# EAGLE board CRSpill (EAGLE 9.6.2)
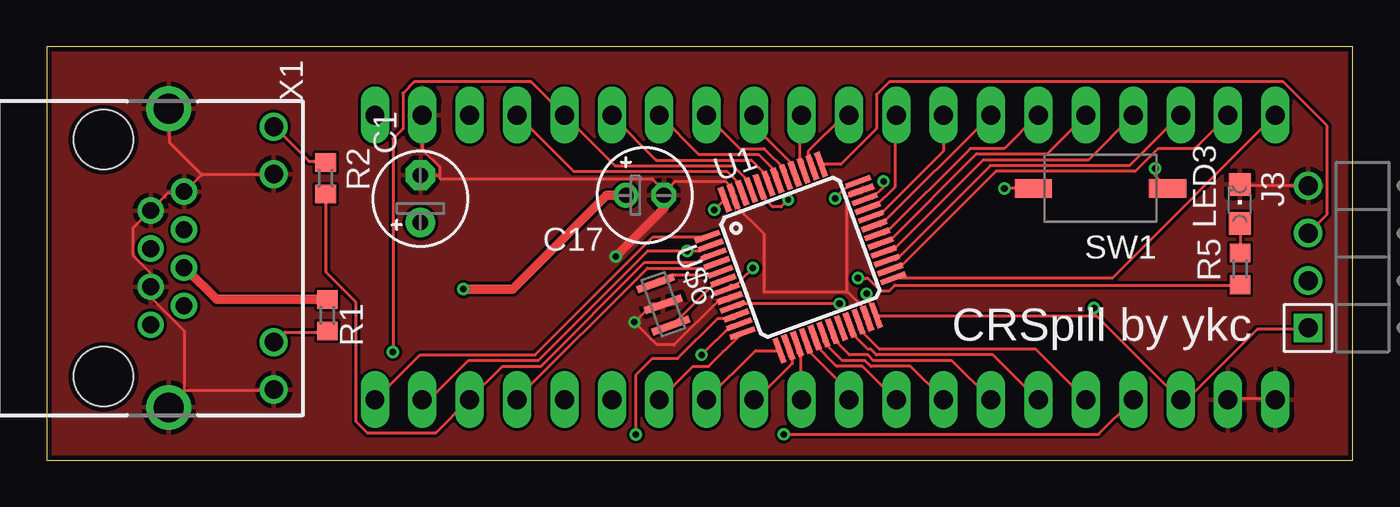
[diagram p0: board, top side]
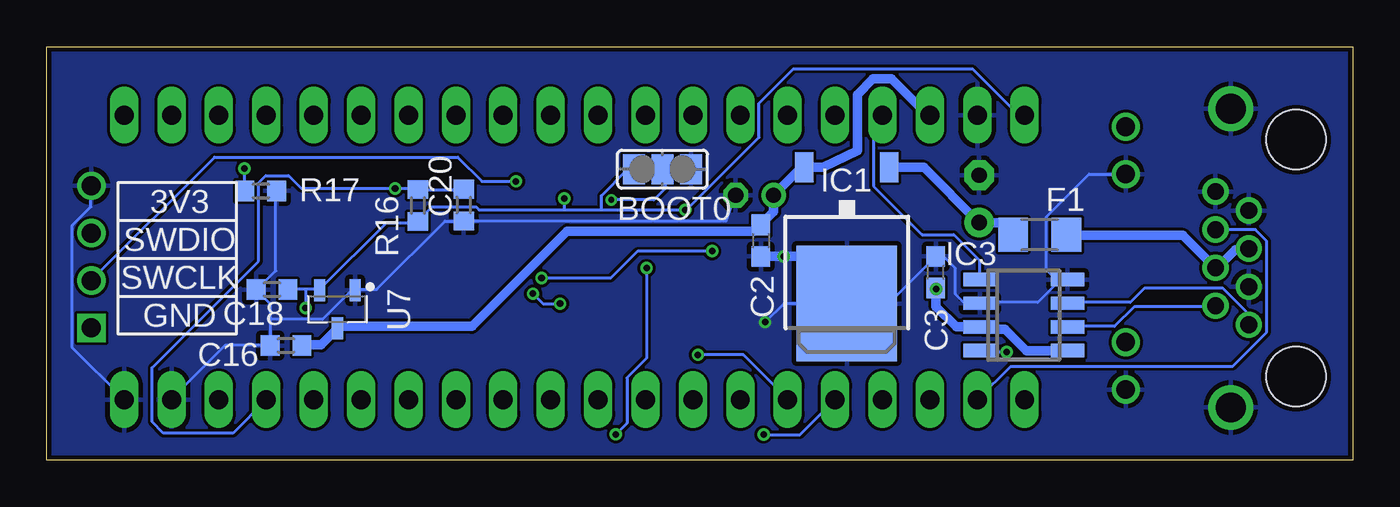
[diagram p1: board, bottom side, seen from below]

Size 70 x 22.16 mm. Coordinates in mm from the lower left corner, seen from the top.
Outline: 0,0 70,0 70,22.16 0,22.16 0,0
Copper layers (1*16): Top 0.035mm / dielectric 1.5mm / Bottom 0.035mm
Design rules "SeeedStudio_2layer_DRU_no_angle_20140221": minimum track width 6mil, minimum drill 12mil, track to track 6mil, track to pad 6mil, pad to pad 6mil, via to via 6mil, smd to smd 0mil, copper to edge 10mil, drill to drill 10mil, minimum pad ring 10mil, minimum via ring 6mil, stop-mask expansion 2mil, vias tented up to drill 100mil, thermal gap 10mil
Net classes: 1 12v: width 0.5 mm

## Footprints (pad centres in the part's own frame; a part is rotated, then mirrored left to right if it is on the bottom)
SJ_2 = smd 1.168 x 1.6: 1 -1.524,0; 2 0,0; 3 1.524,0
E2,5-5 = drill 0.813 pad 1.6: + -1.27,0 | drill 0.813 pad 1.6 octagon: - 1.27,0
C0603 = smd 1.1 x 1: 1 -0.85,0; 2 0.85,0
C0603' = smd 1 x 1.1: 1 -0.85,0; 2 0.85,0
E2-5 = drill 0.813 pad 1.27: + -1.016,0 | drill 0.813 pad 1.27 octagon: - 1.016,0
R1206 = smd 1.6 x 1.803: 1 -1.422,0; 2 1.422,0
TO252 = smd 1 x 1.6: 1 -2.28,-4.8; 2 2.28,-4.8 | smd 5.4 x 6.2: 3 0,2.5
BLUE_PILL = drill 1.016 long: P$1 -7.62,10.16; P$2 -7.62,7.62; P$3 -7.62,5.08; P$4 -7.62,2.54; P$5 -7.62,0; P$6 -7.62,-2.54; P$7 -7.62,-5.08; P$8 -7.62,-7.62; P$9 -7.62,-10.16; P$10 -7.62,-12.7; P$11 -7.62,-15.24; P$12 -7.62,-17.78; P$13 -7.62,-20.32; P$14 -7.62,-22.86; P$15 -7.62,-25.4; P$16 -7.62,-27.94; P$17 -7.62,-30.48; P$18 -7.62,-33.02; P$19 -7.62,-35.56; P$20 -7.62,-38.1; P$21 7.62,-38.1; P$22 7.62,-35.56; P$23 7.62,-33.02; P$24 7.62,-30.48; P$25 7.62,-27.94; P$26 7.62,-25.4; P$27 7.62,-22.86; P$28 7.62,-20.32; P$29 7.62,-17.78; P$30 7.62,-15.24; P$31 7.62,-12.7; P$32 7.62,-10.16; P$33 7.62,-7.62; P$34 7.62,-5.08; P$35 7.62,-2.54; P$36 7.62,0; P$37 7.62,2.54; P$38 7.62,5.08; P$39 7.62,7.62; P$40 7.62,10.16
SO08 = smd 0.72 x 1.78: 1 -1.905,-2.35; 2 -0.635,-2.35; 3 0.635,-2.35; 4 1.905,-2.35; 5 1.905,2.35; 6 0.635,2.35; 7 -0.635,2.35; 8 -1.905,2.35
MA04-1 = drill 1.016 square: 1 3.81,0 | drill 1.016: 2 1.27,0; 3 -1.27,0; 4 -3.81,0
CHIPLED_0805 = smd 1.2 x 1.2: A 0,-1.05; C 0,1.05
R0603 = smd 1 x 1.1: 1 -0.85,0; 2 0.85,0
SWITCH_TACTILE_3X6 = smd 2 x 1: P$1 -3.6,0; P$2 3.6,0
LQFP48 = smd 1.4 x 0.3: 1 -4.3,2.75; 2 -4.3,2.25; 3 -4.3,1.75; 4 -4.3,1.25; 5 -4.3,0.75; 6 -4.3,0.25; 7 -4.3,-0.25; 8 -4.3,-0.75; 9 -4.3,-1.25; 10 -4.3,-1.75; 11 -4.3,-2.25; 12 -4.3,-2.75; 25 4.3,-2.75; 26 4.3,-2.25; 27 4.3,-1.75; 28 4.3,-1.25; 29 4.3,-0.75; 30 4.3,-0.25; 31 4.3,0.25; 32 4.3,0.75; 33 4.3,1.25; 34 4.3,1.75; 35 4.3,2.25; 36 4.3,2.75 | smd 0.3 x 1.4: 13 -2.75,-4.3; 14 -2.25,-4.3; 15 -1.75,-4.3; 16 -1.25,-4.3; 17 -0.75,-4.3; 18 -0.25,-4.3; 19 0.25,-4.3; 20 0.75,-4.3; 21 1.25,-4.3; 22 1.75,-4.3; 23 2.25,-4.3; 24 2.75,-4.3; 37 2.75,4.3; 38 2.25,4.3; 39 1.75,4.3; 40 1.25,4.3; 41 0.75,4.3; 42 0.25,4.3; 43 -0.25,4.3; 44 -0.75,4.3; 45 -1.25,4.3; 46 -1.75,4.3; 47 -2.25,4.3; 48 -2.75,4.3
SOT95P240X110-3 = smd 1.18 x 0.609: 1 -1.024,0.95; 2 -1.024,-0.95; 3 1.024,0
CSTCE8M00G55 = smd 0.4 x 2.1: 1 -1.2,0; 2 0,0; 3 1.2,0
8P8C-LED = drill 0.9 pad 1.3: 1 3.57,-3.81; 2 2.55,-2.03; 3 1.53,-3.81; 4 0.51,-2.03; 5 -0.51,-3.81; 6 -1.53,-2.03; 7 -2.55,-3.81; 8 -3.57,-2.03 | drill 1 pad 1.422: GA 4.5,2.78; GC 7.04,2.78; YA -7.04,2.78; YC -4.5,2.78 | drill 1.6 pad 2.184: M1 -8,-2.85; M2 8,-2.85 | hole 3.2: 6.35,-6.35; -6.35,-6.35

## Placement (x,y rotation side)
BOOT0  [SJ_2]  37,15.6 0 bottom
C1  22u  [E2,5-5]  20.03,14.01 90 top
C2  100n  [C0603]  31.73,11.77 270 bottom
C3  100n  [C0603]  22.35,10.08 90 bottom
C16  100n  [C0603']  57.17,6.15 180 bottom
C17  22u  [E2-5]  32.06,14.2 0 top
C18  100n  [C0603']  57.92,9.15 180 bottom
C20  100n  [C0603']  47.65,13.67 90 bottom
F1  [R1206]  16.78,12.08 0 bottom
IC1  7805DT  [TO252]  27.12,10.9 180 bottom
IC2  BLUE_PILL  [BLUE_PILL]  27.75,10.87 90 top
IC3  NCV7351D1E  [SO08]  17.64,7.78 270 bottom
J3  MA04-1  [MA04-1]  67.6,10.9 270 top
LED3  red  [CHIPLED_0805]  63.94,13.73 0 top
R1  4k7  [R0603]  15.05,7.77 270 top
R2  470  [R0603]  14.95,15.11 90 top
R5  1k  [R0603]  63.95,10.26 90 top
R16  10k  [R0603]  50.11,13.65 90 bottom
R17  100R  [R0603]  58.52,14.43 0 bottom
SW1  SWITCH_TACTILETOP  [SWITCH_TACTILE_3X6]  56.48,14.57 180 top
U1  STM32F103C8  [LQFP48]  40.39,10.87 20 top
U7  XC6206  [SOT95P240X110-3]  54.42,8.09 270 bottom
U$6  CSTCE8M00G55  [CSTCE8M00G55]  33.04,8.36 290 top
X1  8P8C-LED  [8P8C-LED]  9.39,10.83 270 top

## Library data of the parts
BOOT0 = jumper
C1-C3 = rcl; SPICEPREFIX: C
C16-C18 C20 R16 R17 = rcl
F1 R1 R2 R5 = rcl; SPICEPREFIX: R
IC1 = linear
IC2 U1 = stm32_mcu
IC3 = on-semi
J3 = con-headers
LED3 = led
SW1 = switch-tactile
U7 = torex
U$6 = resonator
X1 = con-rj45; OC_FARNELL: unknown; OC_NEWARK: unknown

## Nets
!EMS: IC2.P$2 R5.1 U1.2 X1.6
!RESET: C20.2 IC2.P$17 R16.2 SW1.P$2 U1.7
+3V3: BOOT0.1 C18.1 IC2.P$18 IC2.P$40 J3.1 R16.1 U1.9 U1.24 U1.36 U1.48 U7.2
+5V [12v]: C2.1 C3.1 C16.1 C17.+ IC1.2 IC2.P$38 IC3.3 IC3.5 U7.3
BOOT0: BOOT0.2 U1.44
CANRX: IC2.P$36 IC3.4 U1.45
CANTX: IC2.P$37 IC3.1 U1.46
GND: BOOT0.3 C1.- C2.2 C3.2 C16.2 C17.- C18.2 C20.1 IC1.3 IC2.P$19 IC2.P$20 IC2.P$39 IC3.2 IC3.8 J3.4 LED3.C R17.2 U1.8 U1.23 U1.35 U1.47 U7.1 U$6.2 X1.3 X1.7 X1.8 X1.GC X1.M1 X1.M2 X1.YC
LED_CAN: IC2.P$3 R2.1 U1.3
N$1: R1.2 X1.GA
N$2 [12v]: F1.2 R1.1 X1.4 X1.5
N$3 [12v]: C1.+ F1.1 IC1.1
N$4: IC3.7 X1.1
N$5: IC3.6 X1.2
N$9: R2.2 X1.YA
N$11: U1.6 U$6.3
N$15: LED3.A R5.2
N$16: R17.1 SW1.P$1
N$19: U1.5 U$6.1
PA0: IC2.P$5 U1.10
PA1: IC2.P$6 U1.11
PA2: IC2.P$7 U1.12
PA3: IC2.P$8 U1.13
PA4: IC2.P$9 U1.14
PA5: IC2.P$10 U1.15
PA6: IC2.P$11 U1.16
PA7: IC2.P$12 U1.17
PA8: IC2.P$25 U1.29
PA9: IC2.P$26 U1.30
PA10: IC2.P$27 U1.31
PA11: IC2.P$28 U1.32
PA12: IC2.P$29 U1.33
PA15: IC2.P$30 U1.38
PB0: IC2.P$13 U1.18
PB1: IC2.P$14 U1.19
PB2: U1.20
PB3: IC2.P$31 U1.39
PB4: IC2.P$32 U1.40
PB5: IC2.P$33 U1.41
PB6: IC2.P$34 U1.42
PB7: IC2.P$35 U1.43
PB10: IC2.P$15 U1.21
PB11: IC2.P$16 U1.22
PB12: IC2.P$21 U1.25
PB13: IC2.P$22 U1.26
PB14: IC2.P$23 U1.27
PB15: IC2.P$24 U1.28
PC15: IC2.P$4 U1.4
SWCLK: J3.3 U1.37
SWDIO: J3.2 U1.34
VBAT: IC2.P$1 U1.1

## Tracks (layer width: path | path; a pad name or v marks a point on that pad's centre or on a via)
!EMS  (via drill 0.35)
  Top 0.152: v43.48,9.76 44.01,9.76 44.7,9.08 45.15,9.08 45.46,9.38 63.9,9.38 R5.1 | U1.2 35.55,11.44 35.25,11.44 35.02,11.21 v34.33,11.21 32.2,11.21 26.33,5.34 22.6,5.34 20.54,3.29 20.16,3.29 IC2.P$2
  Bottom 0.152: X1.6 5.22,12.35 4.62,11.74 4.62,6.87 6.44,5.04 18.33,5.04 20.08,3.29 IC2.P$2 | v43.48,9.76 39.78,9.76 38.33,11.21 v34.33,11.21
!RESET  (via drill 0.35)
  Top 0.152: v51.33,14.56 52.85,14.56 SW1.P$2 | U1.7 36.64,9.37 36.68,9.38 36.97,9.38 37.22,9.63 37.22,9.67 v37.85,10.3 | v39.5,1.39 56.37,1.39 IC2.P$17
  Bottom 0.152: C20.2 47.67,14.49 50.11,14.49 R16.2 50.18,14.56 v51.33,14.56 56.35,14.56 57.04,15.25 58.26,15.25 58.64,14.87 58.64,10.68 64.36,4.96 64.36,2.07 63.75,1.46 60.01,1.46 58.26,3.21 IC2.P$17 | v37.85,10.3 37.85,5.47 38.9,4.42 38.9,1.99 v39.5,1.39
+3V3  (via drill 0.35)
  Top 0.152: v42.49,8.39 37.3,8.39 37.15,8.24 36.85,8.24 U1.9 | v43.93,8.93 43.93,8.62 44.39,8.16 44.39,7.78 U1.24 44.47,7.71 56.13,7.71 | J3.1 67.56,7.02 64.89,7.02 61.16,3.29 60.77,3.29 IC2.P$18 60.7,3.29 56.28,7.71 56.13,7.71 | v35.78,13.42 36.31,13.95 U1.48 | v42.26,14.03 43.1,14.87 43.48,14.87 U1.36 | v56.13,8.16 56.13,7.71
  Bottom 0.152: v42.49,8.39 43.4,8.39 v43.93,8.93 | 56.13,9.15 55.44,9.15 U7.2 55.36,9.15 51.78,12.74 50.18,12.74 R16.1 49.34,13.57 46.98,13.57 46.83,13.42 42.26,13.42 | 56.13,9.15 57.04,9.15 C18.1 | 42.26,13.42 40.28,13.42 | 40.28,13.42 v35.78,13.42 35.7,13.42 31.82,17.31 31.82,19.14 29.99,20.96 20.39,20.96 17.95,18.53 17.64,18.53 IC2.P$40 | 42.26,13.42 v42.26,14.03 | 56.13,9.15 v56.13,8.16 | 40.28,13.42 40.28,14.18 38.91,15.55 38.53,15.55 BOOT0.1
+5V  (via drill 0.35)
  Top 0.5: v22.34,9.17 24.98,9.17 30.01,14.2 C17.+
  Bottom 0.5: IC3.5 15.36,5.88 17.49,5.88 18.64,7.02 19.78,7.02 IC3.3 21.25,7.15 22.34,8.24 v22.34,9.17 22.34,9.23 C3.1 | C16.1 56.28,6.18 55.29,6.18 54.45,7.02 U7.3 54.22,7.17 47.21,7.17 42.1,12.28 32.07,12.28 C2.1 31.04,13.31 C17.+ 29.54,15.7 IC1.2 28.4,15.7 26.56,16.58 26.56,19.59 25.72,20.43 24.73,20.43 22.83,18.53 22.67,18.53 IC2.P$38
BOOT0  (via drill 0.3)
  Top 0.152: v39.74,13.95 39.36,13.57 38.91,13.57 38.45,14.03 38.45,14.11 38.22,14.34 U1.44
  Bottom 0.152: v39.74,13.95 37.46,13.95 36.8,14.61 BOOT0.2
CANRX  (via drill 0.35)
  Top 0.152: U1.45 37.69,14.49 37.69,14.87 36.77,15.78 30.45,15.78 27.78,18.45 IC2.P$36 27.7,18.53 25.95,20.28 19.7,20.28 19.09,19.67 19.09,17.76 18.56,17.23 v18.56,5.8
  Bottom 0.152: v18.56,5.8 19.93,5.8 IC3.4
CANTX
  Top 0.152: U1.46 37.23,14.34 37.23,14.72 36.47,15.48 28.24,15.48 25.27,18.45 IC2.P$37
  Bottom 0.152: IC3.1 19.99,10.69 21.39,12.09 23.08,12.09 25.69,14.69 25.69,18.01 IC2.P$37
GND  (via drill 0.35)
  Top 0.152: LED3.C 63.98,14.72 67.56,14.72 J3.4 | IC2.P$19 63.37,3.29 65.8,3.29 IC2.P$20 | 7.4,3.7 6.6,2.9 X1.M2 | 7.4,3.7 7.43,3.74 12.16,3.74 X1.GC | 8.31,15.29 7.43,14.41 X1.8 7.36,14.34 6.52,14.34 5.61,13.42 X1.7 5.53,13.35 4.62,12.43 4.62,10.98 5.53,10.07 5.53,9.31 X1.3 5.61,9.23 5.61,8.7 7.36,6.94 7.36,3.74 7.4,3.7 | 8.31,15.29 8.35,15.33 X1.YC | 8.31,15.29 6.6,17 6.6,18.75 X1.M1 | 42.91,9.04 42.87,9.08 42.87,14.03 43.25,14.41 43.63,14.41 U1.35 | 42.91,9.04 43.93,8.01 43.93,7.63 U1.23 | 42.91,9.04 42.87,9 38.46,9 38.46,12.12 36.85,13.73 36.85,14.11 U1.47 36.77,14.18 36.77,14.56 36.39,14.95 33.67,14.95 C17.- 33.08,14.47 32.45,15.1 21.07,15.1 21.07,15.3 | 21.07,15.3 21.07,15.71 20.16,16.62 20.16,18.45 IC2.P$39 | U$6.2 32.46,8.36 v31.5,7.4 32.33,6.57 32.35,6.52 32.41,6.49 32.72,6.18 33.63,6.18 36.09,8.63 36.25,8.7 U1.8 | C1.- 21.05,15.28 21.07,15.3
  Top 0.5: v30.5,10.92 33.08,13.5 C17.-
  Bottom 0.152: 58.03,7.55 58.03,8.39 58.72,9.08 C18.2 58.72,9.15 57.73,10.14 57.73,14.41 R17.2 | 58.03,7.55 58.03,6.18 C16.2 58.11,6.18 60.39,6.18 63.29,3.29 IC2.P$19 | 58.03,7.55 55.21,7.55 53.69,9.08 53.53,9.08 U7.1 53.46,9.15 52.32,9.15 48.66,12.81 47.67,12.81 C20.1 47.59,12.81 33.58,12.81 C17.- | J3.4 67.63,14.64 67.63,13.57 68.62,12.58 68.62,6.03 65.88,3.29 IC2.P$20 | X1.YC 12.23,15.33 14.14,15.33 16.43,13.04 16.43,10.22 15.82,9.61 IC3.8 15.36,9.61 15.74,9.61 16.88,8.47 19.93,8.47 IC3.2 20.82,8.42 21.3,8.9 21.3,10.3 21.93,10.93 C3.2 24.81,8.47 27.05,8.47 IC1.3 30.5,8.4 v31.5,7.4
  Bottom 0.5: C2.2 v30.5,10.92 29.5,10.92 29.5,10.78 IC1.3
  pour Top: 0.1,22.1 0.1,0.1 69.9,0.1 69.9,22 0.2,22
  pour Bottom: 0.1,22.1 0.1,0.1 69.9,0.1 69.9,22.1
LED_CAN
  Top 0.152: R2.1 14.98,14.26 14.98,10.07 16.58,8.47 16.58,2.07 17.19,1.46 20.84,1.46 22.6,3.21 IC2.P$3 22.67,3.29 24.43,5.04 26.48,5.04 32.05,10.6 34.87,10.6 35.25,10.98 35.7,10.98 U1.3
N$1
  Top 0.152: R1.2 14.98,6.87 12.77,6.87 12.23,6.33 X1.GA
N$2
  Top 0.5: R1.1 14.98,8.62 9.11,8.62 7.43,10.3 X1.4
  Bottom 0.5: F1.2 15.28,12.05 9.11,12.05 7.43,10.37 X1.4 7.13,10.45 6.29,11.29 5.61,11.29 X1.5
N$3
  Bottom 0.5: F1.1 18.86,12.74 C1.+ 22.99,15.7 IC1.1
N$4
  Bottom 0.152: IC3.7 15.28,8.47 11.93,8.47 11.17,9.23 6.98,9.23 5.61,7.86 5.61,7.33 X1.1
N$5
  Bottom 0.152: IC3.6 15.28,7.17 12.77,7.17 11.7,8.24 7.43,8.24 X1.2
N$9
  Top 0.152: R2.2 14.9,16.01 14.06,16.01 12.23,17.84 X1.YA
N$11
  Top 0.152: U$6.3 33.54,7.23 35.94,9.63 U1.6
N$15
  Top 0.152: R5.2 63.98,11.13 63.98,12.66 LED3.A
N$16  (via drill 0.35)
  Top 0.152: v59.4,15.63 59.4,15.25 60.01,14.64 SW1.P$1
  Bottom 0.152: v59.4,15.63 59.4,14.49 R17.1
N$19
  Top 0.152: U1.5 36.09,10.07 35.8,10.07 35.67,9.94 33.58,9.94 33.33,9.69 32.83,9.69 U$6.1
PA0  (via drill 0.35)
  Top 0.152: v31.57,1.38 31.57,4.58 32.46,5.46 33.82,5.46 35.97,7.61 36.87,7.61 U1.10
  Bottom 0.152: v31.57,1.38 29.62,1.38 IC2.P$5
PA1  (via drill 0.35)
  Top 0.152: v35.09,5.65 36.7,7.25 37.08,7.25 U1.11
  Bottom 0.152: v35.09,5.65 32.66,5.65 30.29,3.29 IC2.P$6
PA2
  Top 0.152: U1.12 37.23,6.79 35.48,5.04 34.64,5.04 32.88,3.29 IC2.P$7
PA3
  Top 0.152: U1.13 39.21,5.88 37.99,5.88 35.4,3.29 IC2.P$8
PA4
  Top 0.152: U1.14 39.82,6.03 39.82,5.57 39.97,5.42 39.97,5.19 38.07,3.29 37.91,3.29 IC2.P$9
PA5
  Top 0.152: U1.15 40.28,6.18 40.28,5.73 40.43,5.57 40.43,3.29 IC2.P$10
PA6
  Top 0.152: U1.16 40.73,6.33 40.73,5.95 42.94,3.74 42.94,3.29 IC2.P$11
PA7
  Top 0.152: U1.17 41.19,6.56 41.19,6.18 42.33,5.04 43.7,5.04 45.46,3.29 IC2.P$12
PA8
  Top 0.152: U1.29 44.7,11.67 45.08,11.67 49.8,16.39 53.61,16.39 55.67,18.45 IC2.P$25
PA9
  Top 0.152: U1.30 44.54,12.12 44.92,12.12 49.5,16.7 51.33,16.7 53.08,18.45 IC2.P$26
PA10
  Top 0.152: U1.31 44.39,12.58 44.7,12.58 50.56,18.45 IC2.P$27
PA11
  Top 0.152: U1.32 44.24,13.12 44.62,13.12 48.05,16.54 48.05,18.45 IC2.P$28
PA12
  Top 0.152: U1.33 44.01,13.57 44.39,13.57 45.46,14.64 45.46,18.45 IC2.P$29
PA15
  Top 0.152: U1.38 40.96,15.71 40.96,16.16 40.81,16.32 40.81,16.54 42.72,18.45 42.94,18.45 IC2.P$30
PB0
  Top 0.152: U1.18 41.65,6.72 41.65,6.33 42.64,5.34 43.86,5.34 44.16,5.04 46.3,5.04 48.05,3.29 IC2.P$13
PB1
  Top 0.152: U1.19 42.1,6.87 42.1,6.56 43.02,5.65 44.01,5.65 44.31,5.34 48.51,5.34 50.56,3.29 IC2.P$14
PB3
  Top 0.152: U1.39 40.51,15.55 40.51,16.01 40.35,16.16 40.35,18.37 40.43,18.45 IC2.P$31
PB4
  Top 0.152: U1.40 40.05,15.4 40.05,15.78 37.91,17.92 37.91,18.45 IC2.P$32
PB5
  Top 0.152: U1.41 39.59,15.17 39.59,15.55 38.45,16.7 37.15,16.7 35.4,18.45 IC2.P$33
PB6
  Top 0.152: U1.42 39.13,15.02 39.13,15.4 38.14,16.39 34.94,16.39 32.88,18.45 IC2.P$34
PB7
  Top 0.152: U1.43 38.68,14.87 38.68,15.17 37.76,16.09 32.66,16.09 30.29,18.45 IC2.P$35
PB10
  Top 0.152: U1.21 43.1,7.25 43.1,6.87 44.01,5.95 44.16,5.95 44.47,5.65 50.72,5.65 53.08,3.29 IC2.P$15
PB11
  Top 0.152: U1.22 43.55,7.4 43.55,7.02 44.62,5.95 53,5.95 55.67,3.29 IC2.P$16
PB12
  Top 0.152: U1.25 45.38,9.76 57.12,9.76 65.8,18.45 IC2.P$21
PB13
  Top 0.152: U1.26 45.23,10.3 45.69,10.3 50.87,15.48 58.34,15.48 59.55,16.7 61.54,16.7 63.29,18.45 IC2.P$22
PB14
  Top 0.152: U1.27 45.08,10.75 45.53,10.75 50.56,15.78 58.03,15.78 60.7,18.45 IC2.P$23
PB15
  Top 0.152: U1.28 44.92,11.21 45.31,11.21 50.18,16.09 55.82,16.09 58.18,18.45 IC2.P$24
PC15
  Top 0.152: U1.4 35.69,10.4 35.35,10.4 35.25,10.3 32.2,10.3 25.19,3.29 IC2.P$4
SWCLK
  Top 0.152: U1.37 41.57,15.86 42.56,15.86 44.47,17.76 44.47,19.59 45.15,20.28 66.26,20.28 68.62,17.92 68.62,13.19 67.63,12.2 J3.3
SWDIO  (via drill 0.35)
  Top 0.152: v44.85,14.95 44.85,14.64 44.24,14.03 43.86,14.03 U1.34
  Bottom 0.152: v44.85,14.95 46.68,14.95 47.97,16.24 61,16.24 67.56,9.69 J3.2
VBAT
  Top 0.152: U1.1 32.5,11.97 26.18,5.65 20.01,5.65 17.64,3.29 IC2.P$1

## Text on the board
tPlace: CRSpill by ykc
bPlace: 3V3 | SWDIO | SWCLK | GND